# Altium PCB PCB1.PcbDoc
Units mm, origin at the board's own origin, x right, y up, seen from the top; angles counter-clockwise.
Board outline 22 x 25 mm, 2 copper layers (Top Layer, Bottom Layer); 7 components, 7 nets, 26 pads, 24 vias.
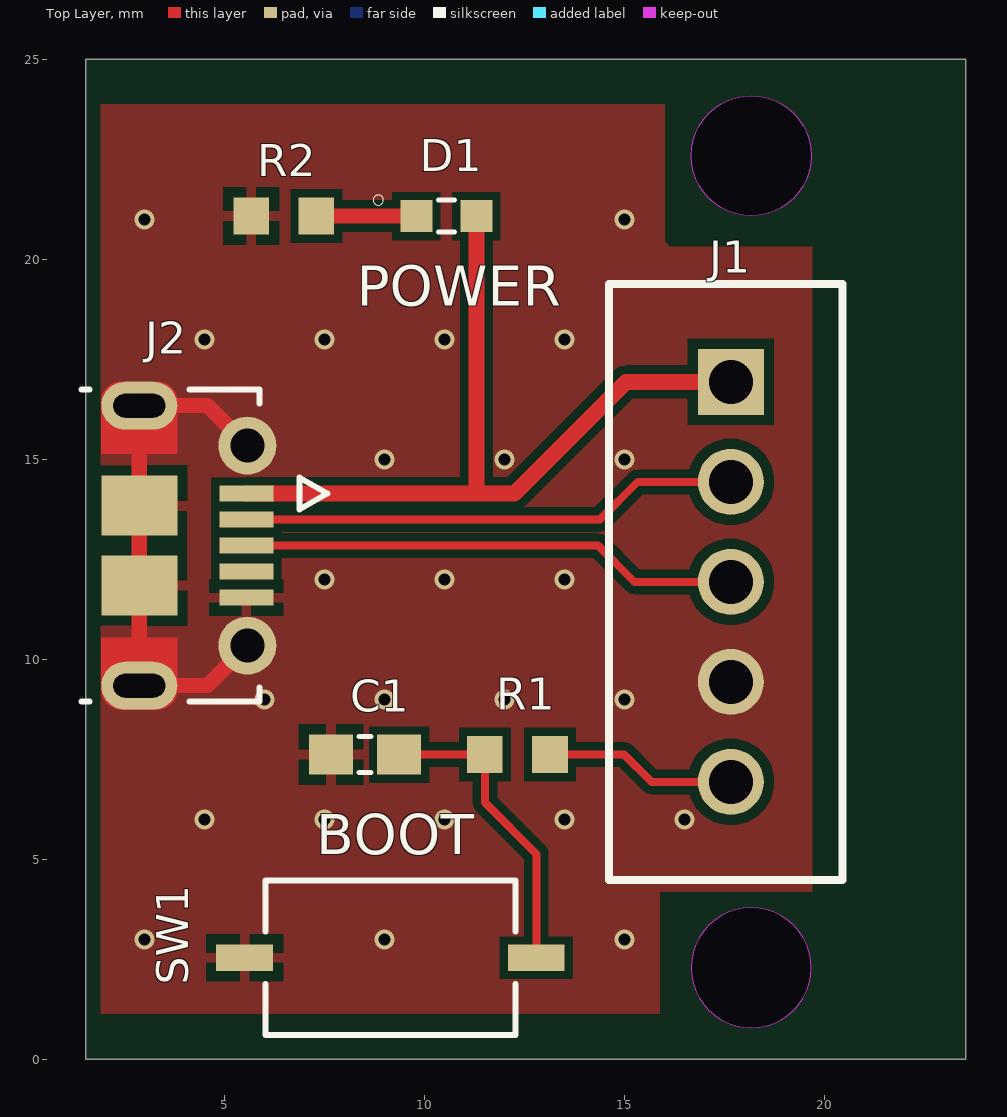
[diagram p0: Top Layer view]
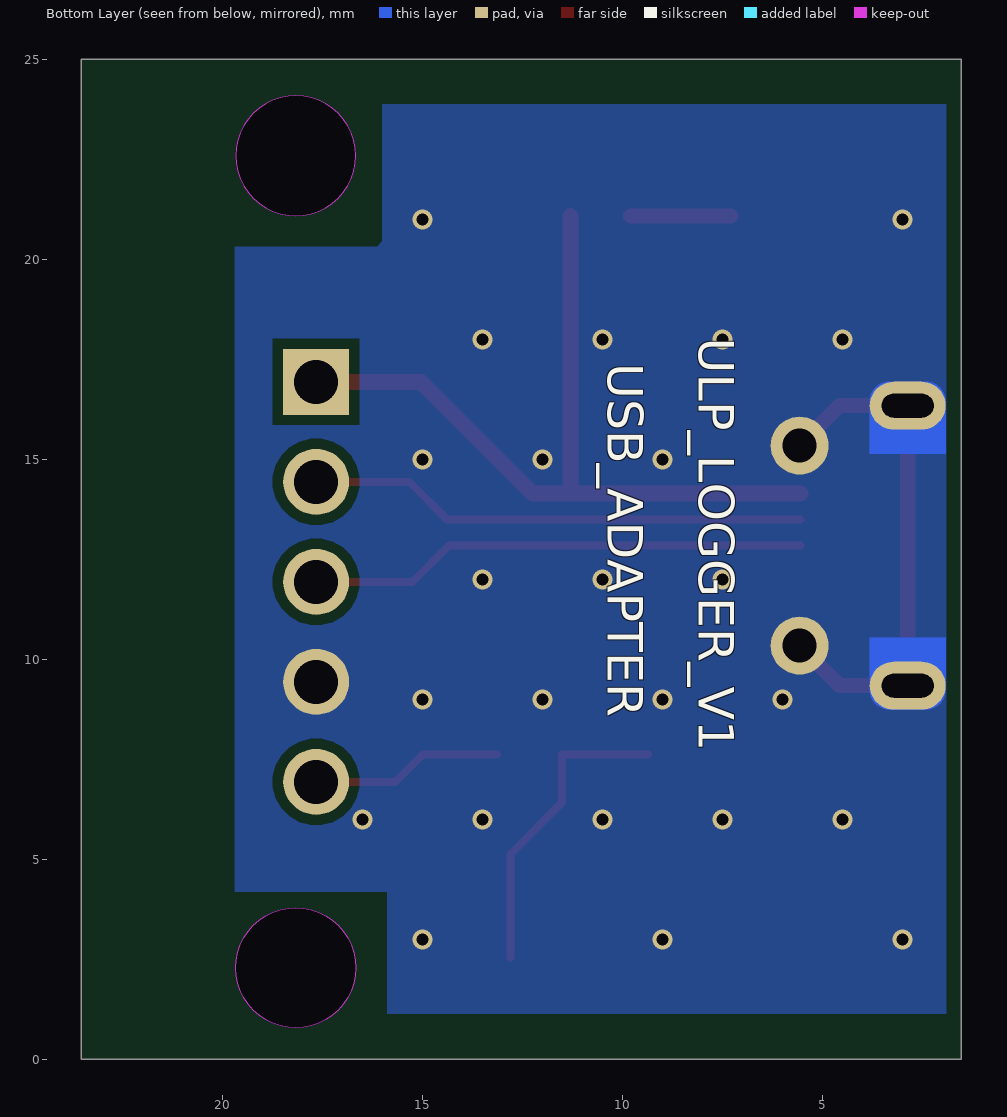
[diagram p1: Bottom Layer view, seen from below]
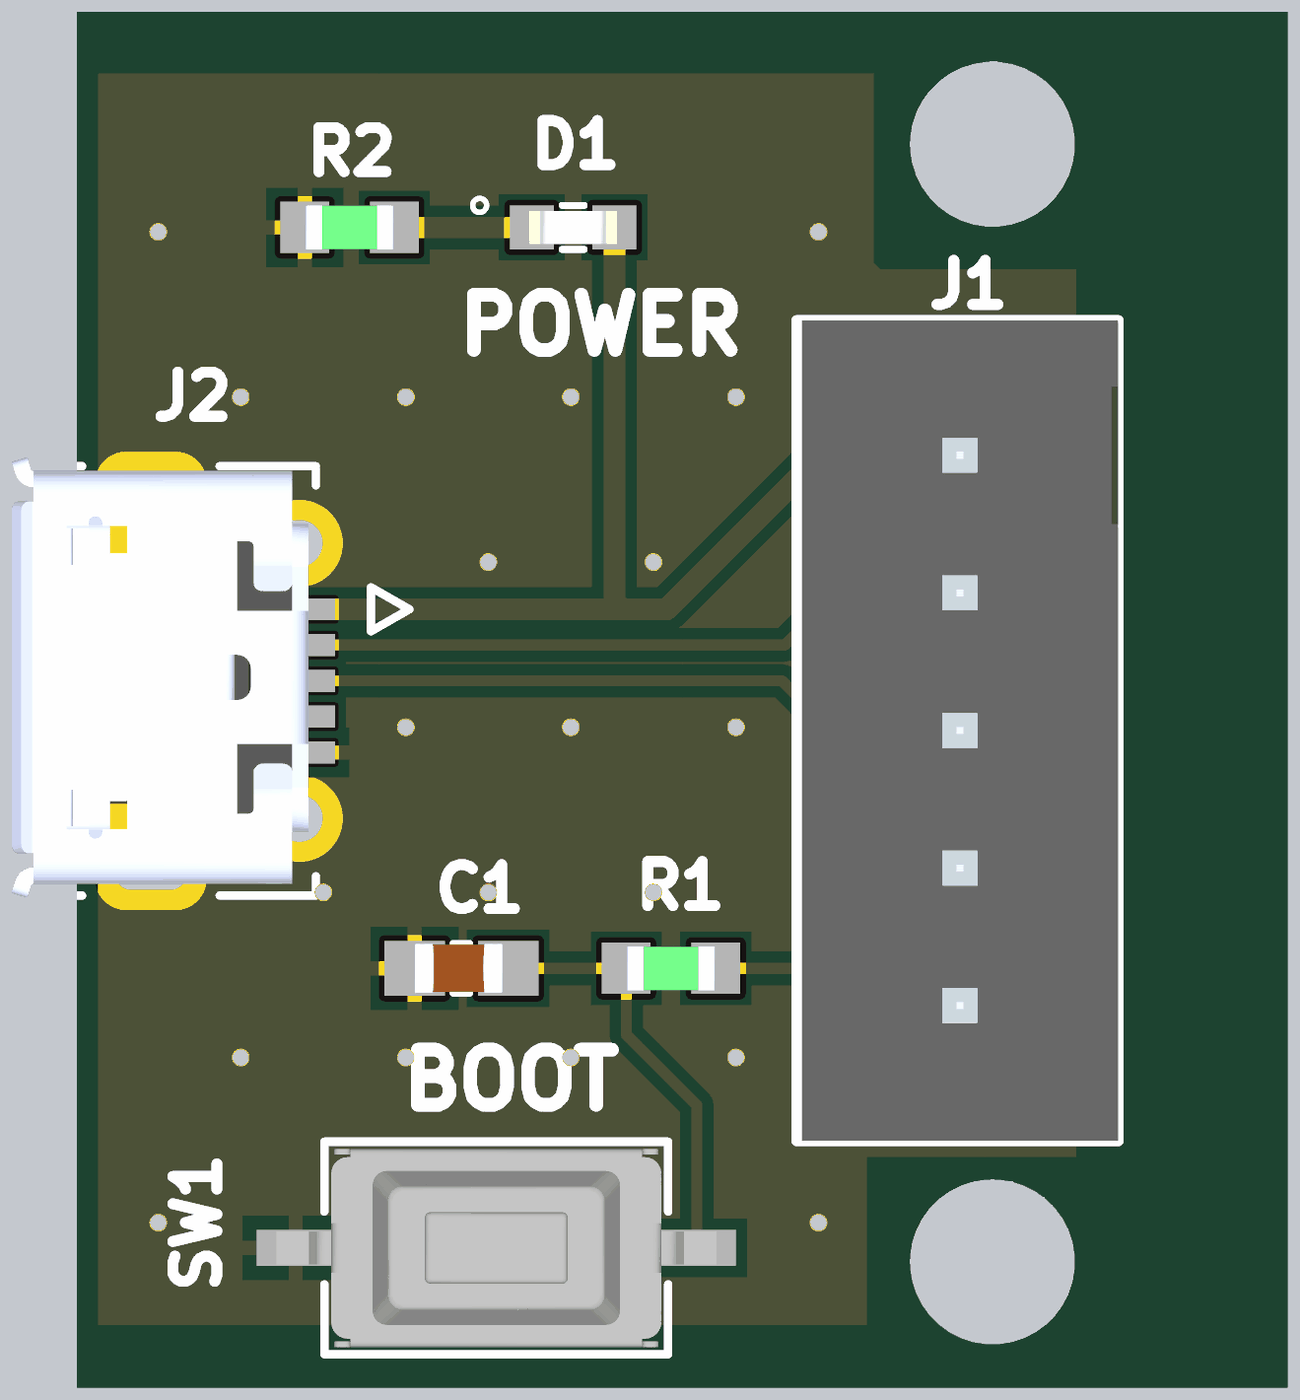
[diagram p2: 3D render of the assembled board from above, using the file's embedded part models]

## Layer stack, top to bottom
Top Solder: solder mask 0.0102, Solder Resist, Dk 3.5
Top Layer: signal copper 0.0356
Dielectric 1: dielectric 0.32, FR-4, Dk 4.8
Bottom Layer: signal copper 0.0356
Bottom Solder: solder mask 0.0102, Solder Resist, Dk 3.5

## Board outline
1.524,0 1.524,25 23.524,25 23.524,0
cut-out: 16.661,2.286 ccw(c18.161,2.286) 18.161,0.786 ccw(c18.161,2.286) 19.661,2.286 ccw(c18.161,2.286) 18.161,3.786 ccw(c18.161,2.286)
cut-out: 18.161,21.093 cw(c18.161,22.593) 16.661,22.593 cw(c18.161,22.593) 18.161,24.093 cw(c18.161,22.593) 19.661,22.593 cw(c18.161,22.593)

## Design rules (kind name [scope] priority, off if disabled: settings)
Clearance [All] p1: gap=0.254 ignorepadtopadclearanceinfootprint=TRUE except(0: Arc-Hole Track-Hole SMDPad-Hole THPad-Hole Via-Hole Fill-Hole Poly-Hole Region-Hole Text-Hole; 0.127: Arc-Arc Arc-Track Track-Track SMDPad-SMDPad; 0.2: Arc-SMDPad Arc-THPad Arc-Fill Arc-Poly Arc-Region Track-SMDPad Track-THPad Track-Fill Track-Poly Track-Region SMDPad-Fill SMDPad-Poly SMDPad-Region)
DiffPairsRouting [All] p1: maxlimit=0.127 minlimit=0.127 mostfreqgap=0.127 toplayer_minwidth=0.133 toplayer_maxwidth=0.133 toplayer_prefwidth=0.133 bottomlayer_minwidth=0.133 bottomlayer_maxwidth=0.133 bottomlayer_prefwidth=0.133 maxuncoupledlength=12.7
HoleSize [All] p1: absolutevalues=TRUE maxlimit=6.3 minlimit=0.025 maxpercent=80.000 minpercent=20.000
MinimumSolderMaskSliver [All] p1: minsoldermaskwidth=0.05
PolygonConnect PolygonConnect_1 [InNetClass('POWER_NET')] p1: connectstyle=Direct reliefconductorwidth=0.254 reliefentries=4 polygonreliefangle="90 Angle" airgapwidth=0.254
PolygonConnect [All] p2: thpad.connectstyle=Direct thpad.reliefconductorwidth=0.254 thpad.reliefentries=4 thpad.polygonreliefangle="90 Angle" thpad.airgapwidth=0.254 smdpad.connectstyle=Relief smdpad.reliefconductorwidth=0.254 smdpad.reliefentries=4 smdpad.polygonreliefangle="90 Angle" smdpad.airgapwidth=0.254 via.connectstyle=Direct via.reliefconductorwidth=0.254 via.reliefentries=4 via.polygonreliefangle="90 Angle" via.airgapwidth=0.254
RoutingVias RoutingVias_POWER [InNetClass('POWER_NET')] p1: holewidth=0.35 width=0.5 viastyle="Through Hole" minholewidth=0.3 minwidth=0.5 maxholewidth=0.711 maxwidth=1.27
RoutingVias [All] p2: holewidth=0.35 width=0.5 viastyle="Through Hole" minholewidth=0.35 minwidth=0.5 maxholewidth=0.35 maxwidth=0.5
SilkToSilkClearance [All] p1: silktosilkclearance=0.1
SilkToSolderMaskClearance [IsPad] p1: minsilkscreentomaskgap=0.05 clearancetoexposedcopper=TRUE
SolderMaskExpansion SolderMaskExpansion_1 [IsVia] p1: expansion=0.102 istentingtop=TRUE
SolderMaskExpansion [All] p2: expansion=0.102 istentingtop=FALSE
Width Power_class [InNetClass('POWER_NET')] p1: maxlimit=2 minlimit=0.305 preferedwidth=0.508 minimp=50.000000 maximp=50.000000 favimp=50.000000
Width [All] p2: maxlimit=2 minlimit=0.127 preferedwidth=0.254 minimp=50.000000 maximp=50.000000 favimp=50.000000
25 further rules are at their usual default settings.

## Classes and differential pairs
component class Sheet1: C1 D1 J1 J2 R1 SW1

## Components (designator, comment, footprint, x,y, rotation, side; value= is the part's Value field where it differs from the comment)
C1 "100 nF" CAP_0603 8.509,7.62 r0 top
D1 "RED" "LED SMD 0603" 10.541,21.082 r0 top
J1 "JST_5P_P=2.5mm" JST_5P_P=2.5mm 17.653,16.938 r90 top
J2 "USB_MICRO_B_MOLEX_1050170001" USB_MICRO_B_MOLEX_1050170001 1.415,12.843 r270 top
R1 "0 Ohm" Res_0603 12.319,7.62 r0 top
R2 "1 KOhm" Res_0603 6.477,21.082 r0 top
SW1 "SPST_SMD_Tactile_sw" SPST_SMD_6mm 9.144,2.54 r180 top

## Footprints (in the part's own frame and the unit in brackets; to place one, negate y for a bottom-side part, rotate by r counter-clockwise, add the part's x,y. Pads: shape width x height; smd on the part's side, far side on the other; paste and mask are expansions set on the pad)
CAP_0603 [mm]
  rect 1.1x1 smd: 1(-0.85,0) 2(0.85,0)
  silkscreen extent -0.15,-0.45 0.15,0.45, body extent -0.85,-0.45 0.75,0.45, height 0.79
JST_5P_P=2.5mm [mm]
  rect 1.65x1.65 / inner round 1.65 / far side rect 1.65x1.65 hole 1.1: 1(0,0)
  round 1.65 hole 1.1: 2(-2.5,0) 3(-5,0) 4(-7.5,0) 5(-10,0)
  silkscreen extent -12.45,-2.79 2.45,3.05, body extent -12.45,-2.79 2.45,2.96, height 7
"LED SMD 0603" [mm]
  rect 0.8x0.8 smd: 1(-0.75,0) 2(0.75,0)
  silkscreen extent -1.83,-0.4 0.2,0.53, body extent -0.8,-0.3 0.8,0.3, height 1
Res_0603 [mm]
  rect 0.89x0.93 smd: 1(-0.814,0) 2(0.814,0)
  body extent -0.8,-0.4 0.8,0.4, height 0.55
SPST_SMD_6mm [mil] "SPST SMD Tactile Switches 3.6mm X2.5m (6mm)"
  rect 56x26 smd paste+0 mask+0: 1(-143.5,0) 2(143.5,0)
  silkscreen extent -123,-76 123,76, body extent -157,-71 157,71, height 98
USB_MICRO_B_MOLEX_1050170001 [mm]
  rect 0.4x1.35 smd mask+0.064: 1(-1.3,4.125) 2(-0.65,4.125) 3(0,4.125) 4(0.65,4.125) 5(1.3,4.125)
  round 1.45 hole 0.85 mask+0.064: SH1(-2.5,4.15) SH2(2.5,4.15)
  oval 1.2x1.9 hole 0.6 slot 1.3 at 90 deg mask+0: SH3(-3.5,1.45) SH6(3.5,1.45)
  rect 1.5x1.9 smd mask+0.064: SH4(-1,1.45) SH5(1,1.45)
  Top Layer region: -2.3,0.5 -3.6,0.5 -3.626,0.501 -3.652,0.503 -3.678,0.506 -3.704,0.511 -3.729,0.517 -3.755,0.524 -3.779,0.533 -3.803,0.543 -3.827,0.554 -3.85,0.567 -3.872,0.581 -3.894,0.595 -3.915,0.611 -3.935,0.628 -3.954,0.646 -3.972,0.665 -3.989,0.685 -4.005,0.706 -4.019,0.728 -4.033,0.75 -4.046,0.773 -4.057,0.797 -4.067,0.821 -4.076,0.845 -4.083,0.871 -4.089,0.896 -4.094,0.922 -4.097,0.948 -4.099,0.974 -4.1,1 -4.1,1.9 -4.099,1.926 -4.097,1.952 -4.094,1.978 -4.089,2.004 -4.083,2.029 -4.076,2.055 -4.067,2.079 -4.057,2.103 -4.046,2.127 -4.033,2.15 -4.019,2.172 -4.005,2.194 -3.989,2.215 -3.972,2.235 -3.954,2.254 -3.935,2.272 -3.915,2.289 -3.894,2.305 -3.872,2.319 -3.85,2.333 -3.827,2.346 -3.803,2.357 -3.779,2.367 -3.755,2.376 -3.729,2.383 -3.704,2.389 -3.678,2.394 -3.652,2.397 -3.626,2.399 -3.6,2.4 -2.3,2.4
  Top Layer region: 3.626,2.399 3.652,2.397 3.678,2.394 3.704,2.389 3.729,2.383 3.755,2.376 3.779,2.367 3.803,2.357 3.827,2.346 3.85,2.333 3.872,2.319 3.894,2.305 3.915,2.289 3.935,2.272 3.954,2.254 3.972,2.235 3.989,2.215 4.005,2.194 4.019,2.172 4.033,2.15 4.046,2.127 4.057,2.103 4.067,2.079 4.076,2.055 4.083,2.029 4.089,2.004 4.094,1.978 4.097,1.952 4.099,1.926 4.1,1.9 4.1,1 4.099,0.974 4.097,0.948 4.094,0.922 4.089,0.896 4.083,0.871 4.076,0.845 4.067,0.821 4.057,0.797 4.046,0.773 4.033,0.75 4.019,0.728 4.005,0.706 3.989,0.685 3.972,0.665 3.954,0.646 3.935,0.628 3.915,0.611 3.894,0.595 3.872,0.581 3.85,0.567 3.827,0.554 3.803,0.543 3.779,0.533 3.755,0.524 3.729,0.517 3.704,0.511 3.678,0.506 3.652,0.503 3.626,0.501 3.6,0.5 2.3,0.5 2.3,2.4 3.6,2.4
  Bottom Layer region: 3.626,2.399 3.652,2.397 3.678,2.394 3.704,2.389 3.729,2.383 3.755,2.376 3.779,2.367 3.803,2.357 3.827,2.346 3.85,2.333 3.872,2.319 3.894,2.305 3.915,2.289 3.935,2.272 3.954,2.254 3.972,2.235 3.989,2.215 4.005,2.194 4.019,2.172 4.033,2.15 4.046,2.127 4.057,2.103 4.067,2.079 4.076,2.055 4.083,2.029 4.089,2.004 4.094,1.978 4.097,1.952 4.099,1.926 4.1,1.9 4.1,1 4.099,0.974 4.097,0.948 4.094,0.922 4.089,0.896 4.083,0.871 4.076,0.845 4.067,0.821 4.057,0.797 4.046,0.773 4.033,0.75 4.019,0.728 4.005,0.706 3.989,0.685 3.972,0.665 3.954,0.646 3.935,0.628 3.915,0.611 3.894,0.595 3.872,0.581 3.85,0.567 3.827,0.554 3.803,0.543 3.779,0.533 3.755,0.524 3.729,0.517 3.704,0.511 3.678,0.506 3.652,0.503 3.626,0.501 3.6,0.5 2.3,0.5 2.3,2.4 3.6,2.4
  Bottom Layer region: -2.3,0.5 -3.6,0.5 -3.626,0.501 -3.652,0.503 -3.678,0.506 -3.704,0.511 -3.729,0.517 -3.755,0.524 -3.779,0.533 -3.803,0.543 -3.827,0.554 -3.85,0.567 -3.872,0.581 -3.894,0.595 -3.915,0.611 -3.935,0.628 -3.954,0.646 -3.972,0.665 -3.989,0.685 -4.005,0.706 -4.019,0.728 -4.033,0.75 -4.046,0.773 -4.057,0.797 -4.067,0.821 -4.076,0.845 -4.083,0.871 -4.089,0.896 -4.094,0.922 -4.097,0.948 -4.099,0.974 -4.1,1 -4.1,1.9 -4.099,1.926 -4.097,1.952 -4.094,1.978 -4.089,2.004 -4.083,2.029 -4.076,2.055 -4.067,2.079 -4.057,2.103 -4.046,2.127 -4.033,2.15 -4.019,2.172 -4.005,2.194 -3.989,2.215 -3.972,2.235 -3.954,2.254 -3.935,2.272 -3.915,2.289 -3.894,2.305 -3.872,2.319 -3.85,2.333 -3.827,2.346 -3.803,2.357 -3.779,2.367 -3.755,2.376 -3.729,2.383 -3.704,2.389 -3.678,2.394 -3.652,2.397 -3.626,2.399 -3.6,2.4 -2.3,2.4
  silkscreen extent -3.9,0 3.9,6.15, body extent -4.06,-1.08 3.94,4.32, height 2.75

## Part data
C1: library part "Cap SMD", "Cap SMD."
D1: library part "LED SMD", "SMD LED"
J1: "JST 1X5P , p=2.5mm XH connector, 5 way , Straight", Arrow Part Number=B5B-XH-A(LF)(SN), LCSC=C42422446, Manufacturer_Name="JST (JAPAN SOLDERLESS TERMINALS)", Mouser Part Number=N/A, Arrow Price/Stock=https://www.arrow.com/en/products/b5b-xh-a-lf-sn/jst-manufacturing, Datasheet Link=http://www.jst-mfg.com/product/pdf/eng/eXH.pdf, Geometry.Height=7mm, Manufacturer_Part_Number=B5B-XH-A(LF)(SN), Mouser Price/Stock=https://www.mouser.co.uk/ProductDetail/JST-Commercial/B5B-XH-ALFSN?qs=IKkN%2F947nfBtEhlRye3uAw%3D%3D
J2: "USB - micro B USB 2.0 Receptacle Connector 5 Position Surface Mount, Right Angle; Through Hole", LCSC=C136000, Package=None, Check_prices=https://www.snapeda.com/parts/1050170001/Molex/view-part/?ref=eda, MF=Molex, MP=1050170001, SnapEDA_Link=https://www.snapeda.com/parts/1050170001/Molex/view-part/?ref=snap
R1 R2: library part "Res smd", "SMD Resistor", Package="2012 Rohm Semiconductor", Availability=Unavailable, MF=Yageo, MP=RC0805FR-07330RL, Price=None, SnapEDA_Link=https://www.snapeda.com/parts/RC0805FR-07330RL/Yageo/view-part/106115/?ref=snap
SW1: "SPST SMD Tactile Switches Rectangle button Brick nogging", Mfr_Name="XKB Connectivity"

## Via types
v1: diameter 0.5, hole 0.3, Top Layer to Bottom Layer, tented both sides, 24 vias

## Nets (pads, with @x,y where several pads share a name; then routed paths per layer and width w, separated by ;. In a path a pad name is that pad's centre, name@x,y a point inside that pad or via, vN(x,y) a via of type N, cw(c..) or ccw(c..) an arc to the next point about the centre after c; other vN are vias at no path point)
BOOT: J1.5 R1.2 | length 4.8
  Top Layer w0.2: R1.2 14.986,7.62 15.668,6.938 J1.5
DN: J1.2 J2.2 | length 12.5
  Top Layer w0.2: J2.2 14.382,13.493 15.327,14.438 J1.2
DP: J1.3 J2.3 | length 12.5
  Top Layer w0.2: J2.3 14.335,12.843 15.24,11.938 J1.3
GND: C1.1 J1.4 J2.5 J2.SH1 J2.SH2 J2.SH3 J2.SH4 J2.SH5 J2.SH6 R2.1 SW1.2 | length 13.2
  Top Layer w0.381: J2.SH2 4.565,9.343 J2.SH6 J2.SH5 J2.SH4 J2.SH3 4.565,16.343 J2.SH1
  other v1: 3,3 9,3 15,3 4.5,6 7.5,6 10.5,6 13.5,6 16.5,6 6,9 9,9 12,9 15,9 7.5,12 10.5,12 13.5,12 9,15 12,15 15,15 4.5,18 7.5,18 10.5,18 13.5,18 3,21 15,21
NetC1_2: C1.2 R1.1 SW1.1 | length 7.8
  Top Layer w0.2: C1.2 R1.1 11.505,6.418 12.789,5.134 SW1.1
NetD1_1: D1.1 R2.2 | length 2.5
  Top Layer w0.381: R2.2 D1.1
VUSB: D1.2 J1.1 J2.1 | length 20.3
  Top Layer w0.4: J2.1 11.43,14.143 ; D1.2 11.291,14.282 11.43,14.143 ; J1.1 15.033,16.938 12.238,14.143 11.43,14.143
pads on no net: J2.4

## Polygon pours and split planes (outlines as drawn)
GND on Top Layer "GND_L01_P000" (solid, pour order 0): 16.002,23.876 16.002,20.447 16.129,20.32 19.685,20.32 19.685,4.191 15.875,4.191 15.875,1.143 15.494,1.143 1.905,1.143 1.905,23.876
GND on Bottom Layer "GND_L02_P001" (solid, pour order 1): 16.002,23.876 16.002,20.447 16.129,20.32 19.685,20.32 19.685,4.191 15.875,4.191 15.875,1.143 15.494,1.143 1.905,1.143 1.905,23.876

## Silkscreen, mask and mechanical layers (free items; w line width, h text height)
Top Overlay:
  text "POWER" at 8.301,18.842 h1
  text "BOOT" at 7.285,5.126 h1
Bottom Overlay:
  text "ULP_LOGGER_V1" at 8.382,18.034 h1.52 r90
  text "USB_ADAPTER" at 10.668,17.399 h1.52 r90
Mechanical 1:
  circle w0.1: c18.161,22.593 r1.5
  circle w0.1: c18.161,2.286 r1.5
  lines w0.3: 1.524,0 23.524,0 23.524,25 1.524,25 1.524,0